# Altium PCB PPG Board.PcbDoc
Units mil, origin at the board's own origin, x right, y up, seen from the top; angles counter-clockwise.
Board outline 1485 x 930 mil, 2 copper layers (Top Layer, Bottom Layer); 17 components, 10 nets, 66 pads, 0 vias.
Unrouted connection lines stored in the file: 49.
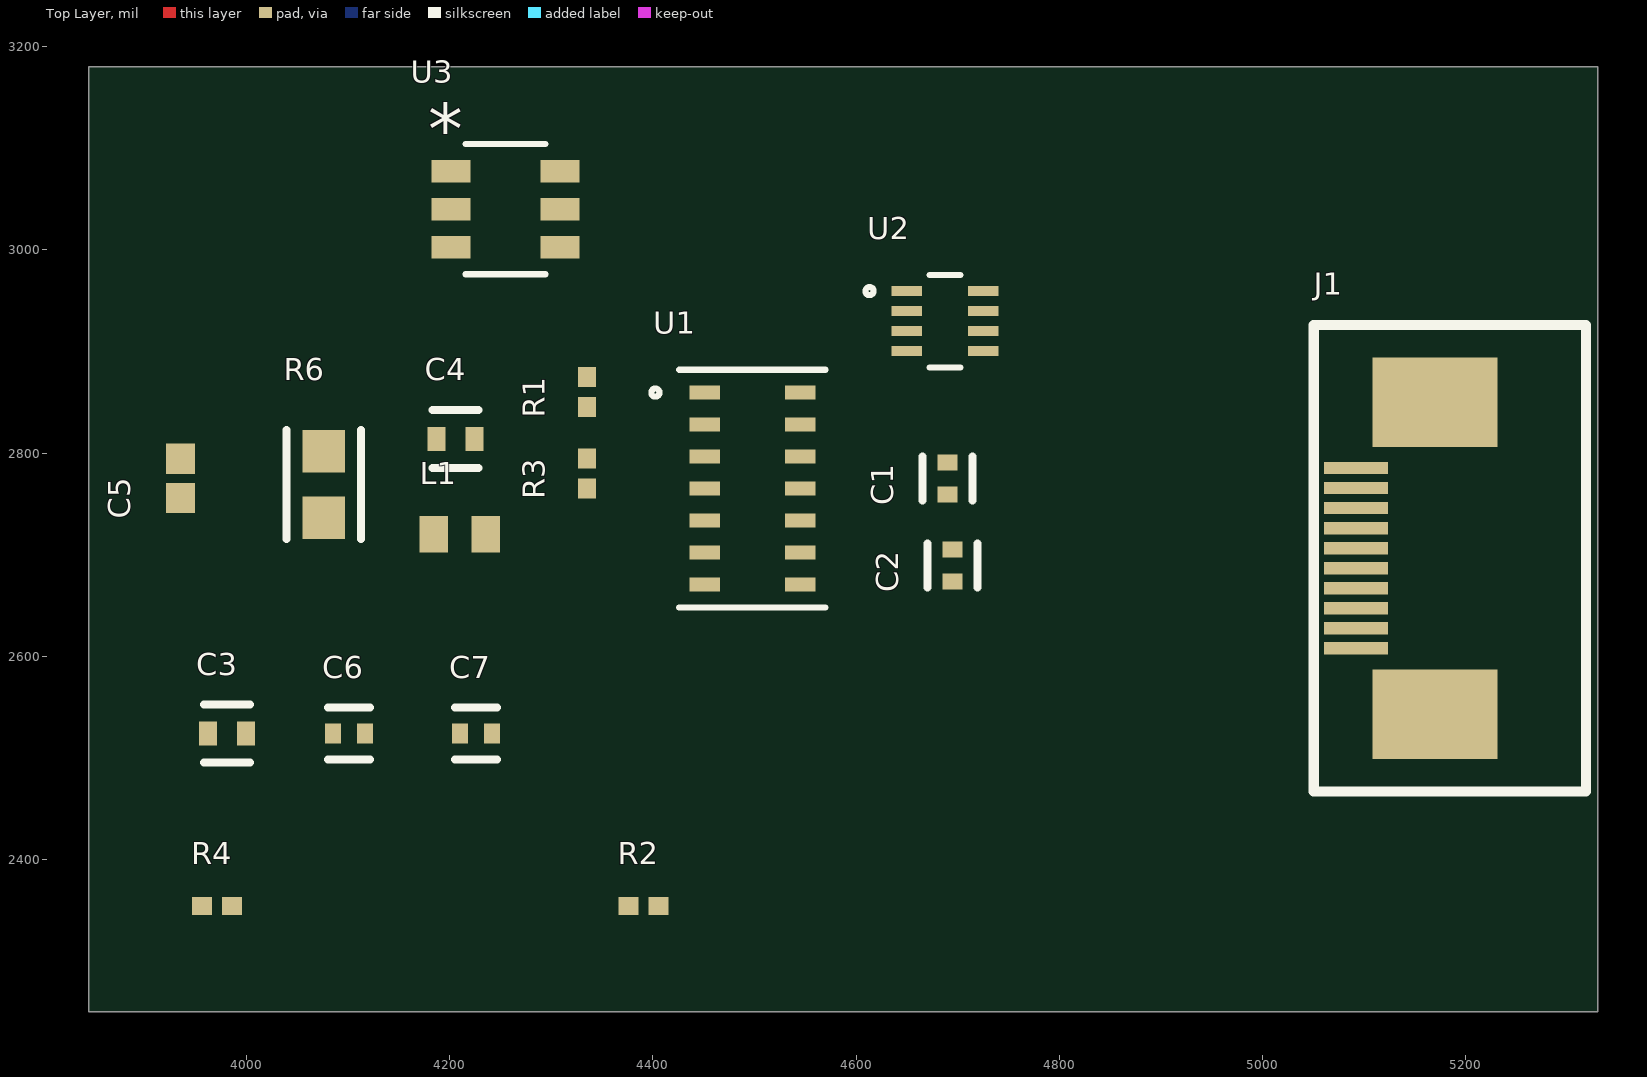
[diagram p0: Top Layer view]
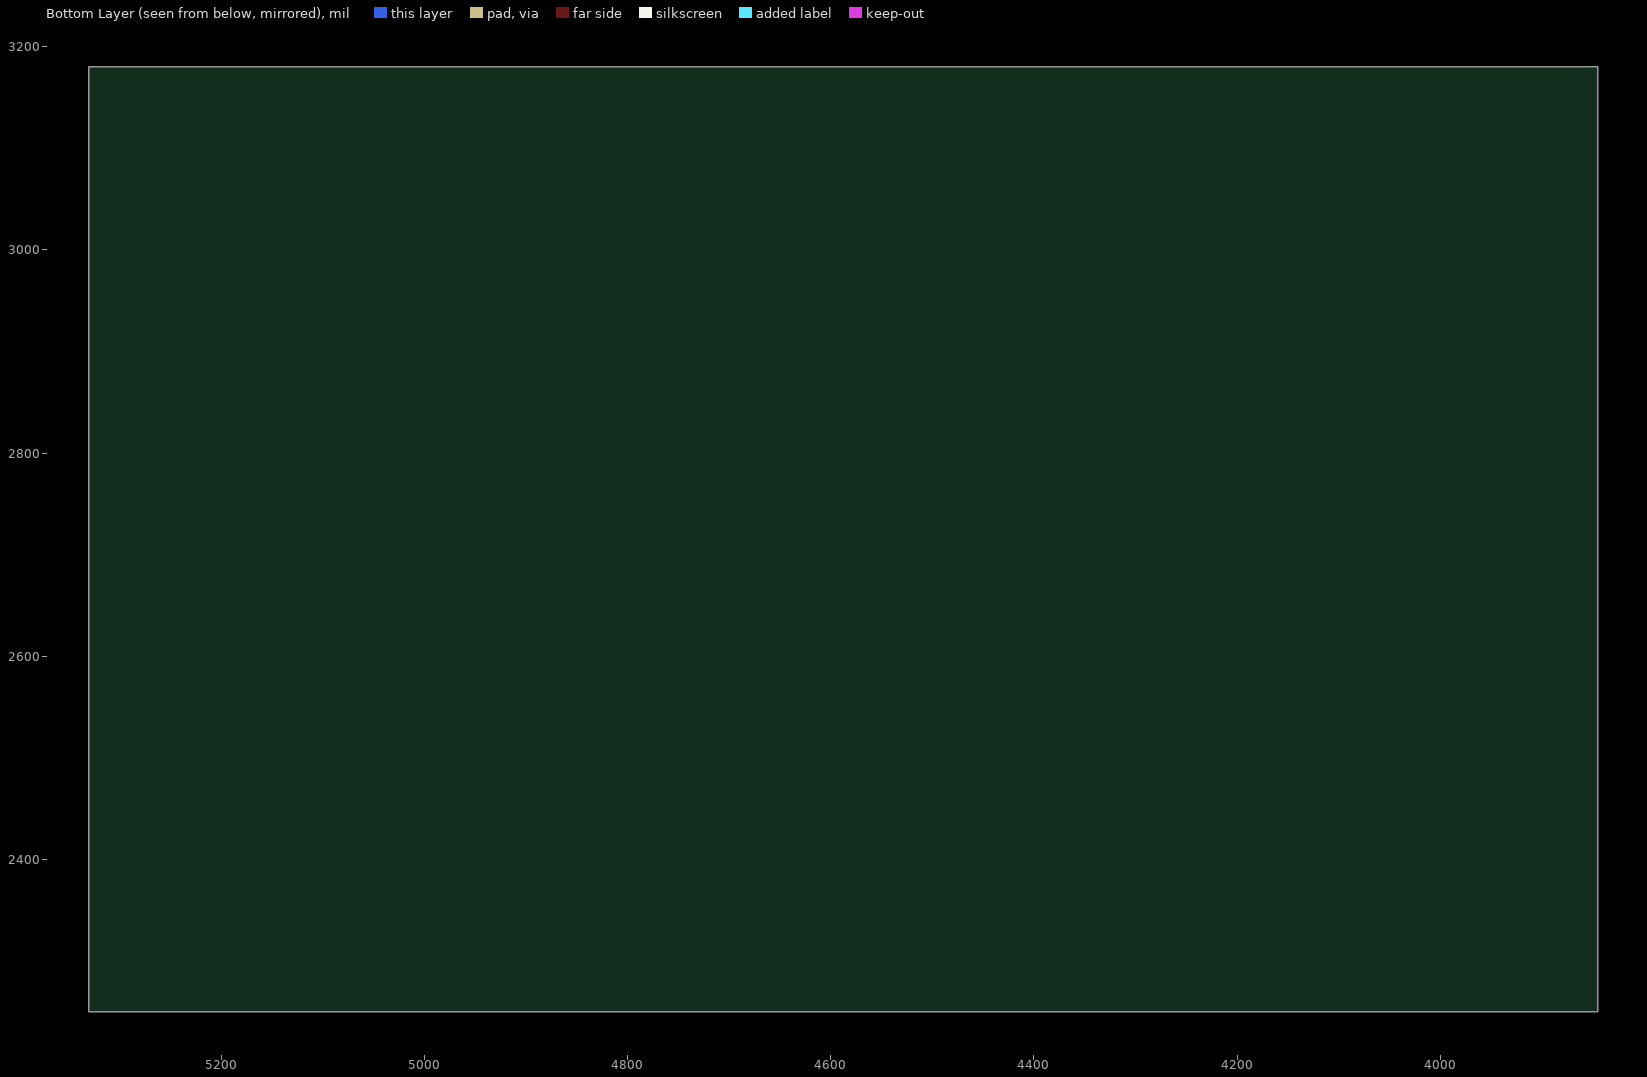
[diagram p1: Bottom Layer view, seen from below]

## Layer stack, top to bottom
Top Solder: solder mask 0.4, Solder Resist, Dk 3.5
Top Layer: signal copper 1.4
Dielectric 1: dielectric 12.6, FR-4, Dk 4.8
Bottom Layer: signal copper 1.4
Bottom Solder: solder mask 0.4, Solder Resist, Dk 3.5

## Board outline
3845,2250 5330,2250 5330,3180 3845,3180

## Design rules (kind name [scope] priority, off if disabled: settings)
Clearance [All] p1: gap=10 ignorepadtopadclearanceinfootprint=TRUE except(0: Arc-Hole Track-Hole SMDPad-Hole THPad-Hole Via-Hole Fill-Hole Poly-Hole Region-Hole Text-Hole)
PolygonConnect [All] p1: connectstyle=Relief reliefconductorwidth=10 reliefentries=4 polygonreliefangle="90 Angle" airgapwidth=10
RoutingVias [All] p1: holewidth=28 width=50 viastyle="Through Hole" minholewidth=28 minwidth=50 maxholewidth=28 maxwidth=50
SolderMaskExpansion [All] p1: expansion=4 istentingtop=FALSE
Width [All] p1: maxlimit=10 minlimit=10 preferedwidth=10
30 further rules are at their usual default settings.

## Components (designator, comment, footprint, x,y, rotation, side; value= is the part's Value field where it differs from the comment)
C1 "GRM155R61A105KE15D" FP-GRM15-0_1-MFG 4690,2775 r90 top value=1uF
C2 "GRM155R61A105KE15D" FP-GRM15-0_1-MFG 4695,2689.25 r90 top value=1uF
C3 "GRM155R60J475ME87D" FP-GRM155-0_15-MFG 3981,2523.98 r0 top
C4 "GRM155R60J475ME87D" FP-GRM155-0_15-MFG 4206,2813.98 r0 top
C5 "GRM155R71E562KA01D" CAPC1005X55X25ML05T10 3935,2775 r90 top
C6 "C1005X7R1C104K050BC" FP-C1005-050-0_05-MFG 4101,2523.98 r0 top
C7 "C1005X7R1C104K050BC" FP-C1005-050-0_05-MFG 4226,2523.98 r0 top
J1 "ZF5S-10-01-X-WT" ZF5S-10-01-X-WT 5092,2696.5 r90 top
L1 "GLFR1608T4R7M-LR" INDC1608X100X35LL20T15 4210,2720 r0 top
R1 "RC0402JR-074K7L" RESC1005X40X25LL05T10 4335,2860 r90 top
R2 "RC0402JR-074K7L" RESC1005X40X25LL05T10 4391,2353.98 r0 top
R3 "RC0402JR-074K7L" RESC1005X40X25LL05T10 4335,2780 r90 top
R4 "RC0402JR-074K7L" RESC1005X40X25LL05T10 3971,2353.98 r0 top
R6 "MCT06030C4751FP500" FP-MCT0603-IPC_A 4076,2768.98 r90 top
U1 "MAX30102EFD+" 21-1048_F143A5+1_MXM 4498,2765 r0 top
U2 "MAX14595ETA+" 21-0487_T822CN+1_MXM 4687.5,2929.84 r0 top
U3 "MAX1921EUT18+" 21-0058I_MXM 4255,3040 r0 top

## Footprints (in the part's own frame and the unit in brackets; to place one, negate y for a bottom-side part, rotate by r counter-clockwise, add the part's x,y. Pads: shape width x height; smd on the part's side, far side on the other; paste and mask are expansions set on the pad)
21-0058I_MXM [mil]
  rect 38.5x22 smd paste+0 mask+0: 1(-53.75,37.4) 2(-53.75,0) 3(-53.75,-37.4) 4(53.75,-37.4) 5(53.75,0) 6(53.75,37.4)
  silkscreen extent -40,-64 40,64, body extent -59,-59 59,59, height 57
21-0487_T822CN+1_MXM [mil]
  rect 30x10 smd paste+0 mask+0: 1(-37.5,29.53) 2(-37.5,9.84) 3(-37.5,-9.84) 4(-37.5,-29.53) 5(37.5,-29.53) 6(37.5,-9.84) 7(37.5,9.84) 8(37.5,29.53)
  silkscreen extent -78,-46 15,46, body extent -41,-41 41,41, height 32
21-1048_F143A5+1_MXM [mil]
  rect 30x14 smd paste+0 mask+0: 1(-47,94.49) 2(-47,62.99) 3(-47,31.5) 4(-47,0) 5(-47,-31.5) 6(-47,-62.99) 7(-47,-94.49) 8(47,-94.49) 9(47,-62.99) 10(47,-31.5) 11(47,0) 12(47,31.5) 13(47,62.99) 14(47,94.49)
  silkscreen extent -99,-117 72,117, body extent -67,-112 67,112, height 65
CAPC1005X55X25ML05T10 [mm] "Chip Capacitor, 2-Leads, Body 1.00x0.50mm, IPC Low Density"
  rect 0.76x0.72 smd: 1(-0.49,0) 2(0.49,0)
  body extent -0.53,-0.28 0.53,0.27, height 0.55
FP-C1005-050-0_05-MFG [mm]
  rect 0.4x0.5 smd paste+0 mask+0: 1(-0.4,0) 2(0.4,0)
  silkscreen extent -0.53,-0.65 0.53,0.65, body extent -0.7,-0.38 0.7,0.38, height 0.25
FP-GRM15-0_1-MFG [mm]
  rect 0.4x0.5 smd paste+0 mask+0: 1(-0.4,0) 2(0.4,0)
  silkscreen extent -0.55,-0.63 0.55,0.63, body extent -0.7,-0.38 0.7,0.38, height 0.25
FP-GRM155-0_15-MFG [mm]
  rect 0.45x0.6 smd paste+0 mask+0: 1(-0.475,0) 2(0.475,0)
  silkscreen extent -0.58,-0.73 0.58,0.72, body extent -0.8,-0.43 0.8,0.43, height 0.25
FP-MCT0603-IPC_A [mil]
  rect 41.88x41.82 smd paste+0 mask+0: 1(-32.65,0) 2(32.65,0)
  silkscreen extent -54,-37 54,37, body extent -73,-41 73,41, height 10
INDC1608X100X35LL20T15 [mm] "Chip Inductor, 2-Leads, Body 1.8x1mm, IPC High Density"
  rect 0.71x0.92 smd: 1(-0.65,0) 2(0.65,0)
  body extent -0.9,-0.5 0.9,0.5, height 1
RESC1005X40X25LL05T10 [mm] "Chip Resistor, 2-Leads, Body 1.00x0.50mm, IPC High Density"
  rect 0.5x0.45 smd: 1(-0.375,0) 2(0.375,0)
  body extent -0.53,-0.27 0.53,0.28, height 0.4
ZF5S-10-01-X-WT [mil]
  rect 12x63 smd mask+2: 1(-88.65,0) 2(-68.95,0) 3(-49.25,0) 4(-29.55,0) 5(-9.85,0) 6(9.85,0) 7(29.55,0) 8(49.25,0) 9(68.95,0) 10(88.65,0)
  rect 88x123 smd mask+2: G1(-153.5,-78) G2(153.5,-78)
  silkscreen extent -230,-226 230,42

## Part data
C1 C2: library part CMP-2008-04556-2, "CAP CER 1UF 10V X5R 0402", Capacitance=1uF, Manufacturer=Murata, Package=GRM15-0.1, Temperature="-55°C to +85°C", Temperature Characteristic=X5R, Temperature Coefficient=15%, Temperature Range High=+85°C, Temperature Range Low=-55°C, Tolerance=10%, Voltage Rating=10V, Automotive=No, Category=Cap, ComponentLink2Description=Datasheet, ComponentLink2URL=https://search.murata.co.jp/Ceramy/image/img/A01X/G101/ENG/GRM155R61A105KE15-01A.pdf, Device Class L1="Passive Components", Device Class L2=Capacitors, Device Class L3="Ceramic Capacitors", Digikey Description="CAP CER 1UF 10V X5R 0402", Height=0.55mm, Ipc Land Pattern Name=CAPC10050X50, Lead Free=Yes, Manufacturer Part Number=GRM155R61A105KE15D, Material=Ceramic, Mouser Description="0402 1 uF 10 V ±10% Tolerance X5R Surface Mount Multilayer Ceramic Capacitor", Octopart=https://octopart.com/grm155r61a105ke15d-murata-197442, RoHS=TRUE
C3 C4: library part CMP-2008-04550-5, "Chip Multilayer Ceramic Capacitors for General Purpose, 0402, 4.7uF, X5R, 15%, 20%, 6.3V", Capacitance=4.7uF, Case Code (Imperial)=0402, Case Code (Metric)=1005, Dielectric=X5R, Max Operating Temperature=85°C, Min Operating Temperature=-55°C, Package Quantity=1, Tolerance=20%, Voltage=6.3V, Case/Package=0402, Construction=Flat, Depth=0.5mm, Height=0.5mm, Lead Free="Lead Free", Length=1mm, Mount="Surface Mount", Packaging="Tape and Reel", Radiation Hardening=No, REACH SVHC="No SVHC", Series=GRM, Thickness=0.022inch, Voltage Rating=6.3V, Voltage Rating (DC)=6.3V, Width=0.02inch
C5: library part CMP-2008-04631-1, Manufacturer=Murata, Part Number=GRM155R71E562KA01D
C6 C7: library part CMP-08246-004182-1, "Multilayer Ceramic Capacitors 100nF ±10% 16V X7R SMD 0402", Capacitance=100nF, Case Code (Imperial)=0402, Case Code (Metric)=1005, Dielectric=X7R, Dielectric Material=Ceramic, Max Operating Temperature=125°C, Min Operating Temperature=-55°C, Package Quantity=1, Tolerance=10%, Voltage=16V, Case/Package=0402, Construction=Flat, Depth=0.5mm, Height=0.5mm, Lead Free="Lead Free", Length=1mm, Mount="Surface Mount", Number of Pins=2, Packaging="Tape and Reel", Radiation Hardening=No, Resistor Type=Ceramic, RoHS Compliant=Yes, Series=C, Termination=SMD/SMT, Thickness=0.022inch, Voltage Rating=16V, Voltage Rating (DC)=16V, Weight=2.3E-05oz, Width=0.02inch
J1: "ZERO INSERTION FORCE 0.5MM ASSEMBLY, 01 LEAD STYLE.", Manufacturer=SAMTEC, CREATED="January 30, 2015 - Wendy Xin", PCB DECAL=ZF5S-10-01-X-WT
L1: library part CMP-2000-06322-1, "Chip Inductor, 4.7 uH, +/- 20%, -40 to 105 degC, 0603 (1608 Metric), RoHS, Tape and Reel", Current - Saturation=170mA, Current Rating=110mA, DC Resistance (DCR)=240mOhm, Inductance=4.7µH, Manufacturer=TDK, Operating Temperature=-40°C~105°C, Package / Case=0603(1608Metric), Package Description="2-Pin Surface Mount Device, Body 1.6 x 0.8 mm", Package Reference=0603, Standard Package=4,000, Tolerance=±20%, Catalog Drawings="1608(0603)Top /  / 1608(0603)Side", Category=Inductors,Coils,Chokes, Datasheet URL=http://media.digikey.com/pdf/Data%20Sheets/TDK%20PDFs/GLFR%20Series.pdf, Datasheet Version=07/2008, Dynamic Catalog=GLFRSeries, Family=FixedInductors, Manufacturer URL=http://www.tdk.com/, Mounting Technology=SurfaceMount, Mounting Type=SurfaceMount, Other Names=445-3607-2, Other Related Documents=1608(0603)Footprint, Packaging=Tape&Reel(TR), Series=GLFR, Shielding=Shielded, Size / Dimension="0.063\"Lx0.031\"Wx0.031\"H(1.60mmx0.80mmx0.80mm)"
R1 R2 R3 R4: library part CMP-2002-08011-1, Manufacturer="Yageo / Phycomp", Part Number=RC0402JR-074K7L
R6: library part CMP-02407-008681-1, "RES SMD 100 OHM 1% 1/8W 0603", Case Code (Imperial)=0603, Case Code (Metric)=1608, Max Operating Temperature=125°C, Max Power Dissipation=125mW, Min Operating Temperature=-55°C, Package Quantity=1, Resistance=4.75kR, Temperature Coefficient=50ppm/°C, Tolerance=1%, Case/Package=0603, Composition="Thin Film", Contact Plating=Tin, Depth=0.85mm, Height=0.022inch, Lead Free="Lead Free", Length=0.061inch, Military Standard=Not, Number of Terminations=2, Packaging="Tape and Reel", Radiation Hardening=No, Width=0.033inch
U1 U2 U3: "No Description Available", Mfr_Name="Analog Devices Inc", Copyright="Copyright (C) 2023 Ultra Librarian. All rights reserved.", RefDes=RefDes, Type=DEV
  U1: Manufacturer_Part_Number=MAX30102EFD+
  U2: Manufacturer_Part_Number=MAX14595ETA+
  U3: Manufacturer_Part_Number=MAX1921EUT18+

## Nets (pads, with @x,y where several pads share a name; then routed paths per layer and width w, separated by ;. In a path a pad name is that pad's centre, name@x,y a point inside that pad or via, vN(x,y) a via of type N, cw(c..) or ccw(c..) an arc to the next point about the centre after c; other vN are vias at no path point)
1V8: C1.1 C5.2 C7.1 R1.1 R3.1 U1.11 U2.5 U2.8
GND: C1.2 C2.2 C3.2 C4.2 C6.2 C7.2 J1.3 J1.4 J1.5 J1.6 J1.7 J1.9 J1.10 J1.G1 J1.G2 U1.4 U1.12 U2.1 U3.2 U3.5
NetC4_1: C4.1 L1.2
NetC5_1: C5.1 R6.1 U3.4
NetL1_1: L1.1 R6.2 U3.6
NetR1_2: R1.2 U1.2 U2.6
NetR3_2: R3.2 U1.3 U2.7
SCL: J1.2 R4.2 U2.3
SDA: J1.8 R2.2 U2.2
VIN: C2.1 C3.1 C6.1 J1.1 R2.1 R4.1 U1.9 U1.10 U2.4 U3.1 U3.3
pads on no net: U1.1 U1.5 U1.6 U1.7 U1.8 U1.13 U1.14

## Text inside footprints (layer, text, board x,y; h text height)
U3: Top Overlay "*" at 4178.75,3094.4 h50; Mechanical 13 "*" at 4223,3046 h50